# EAGLE board w10_myboard (EAGLE 8.0.1)
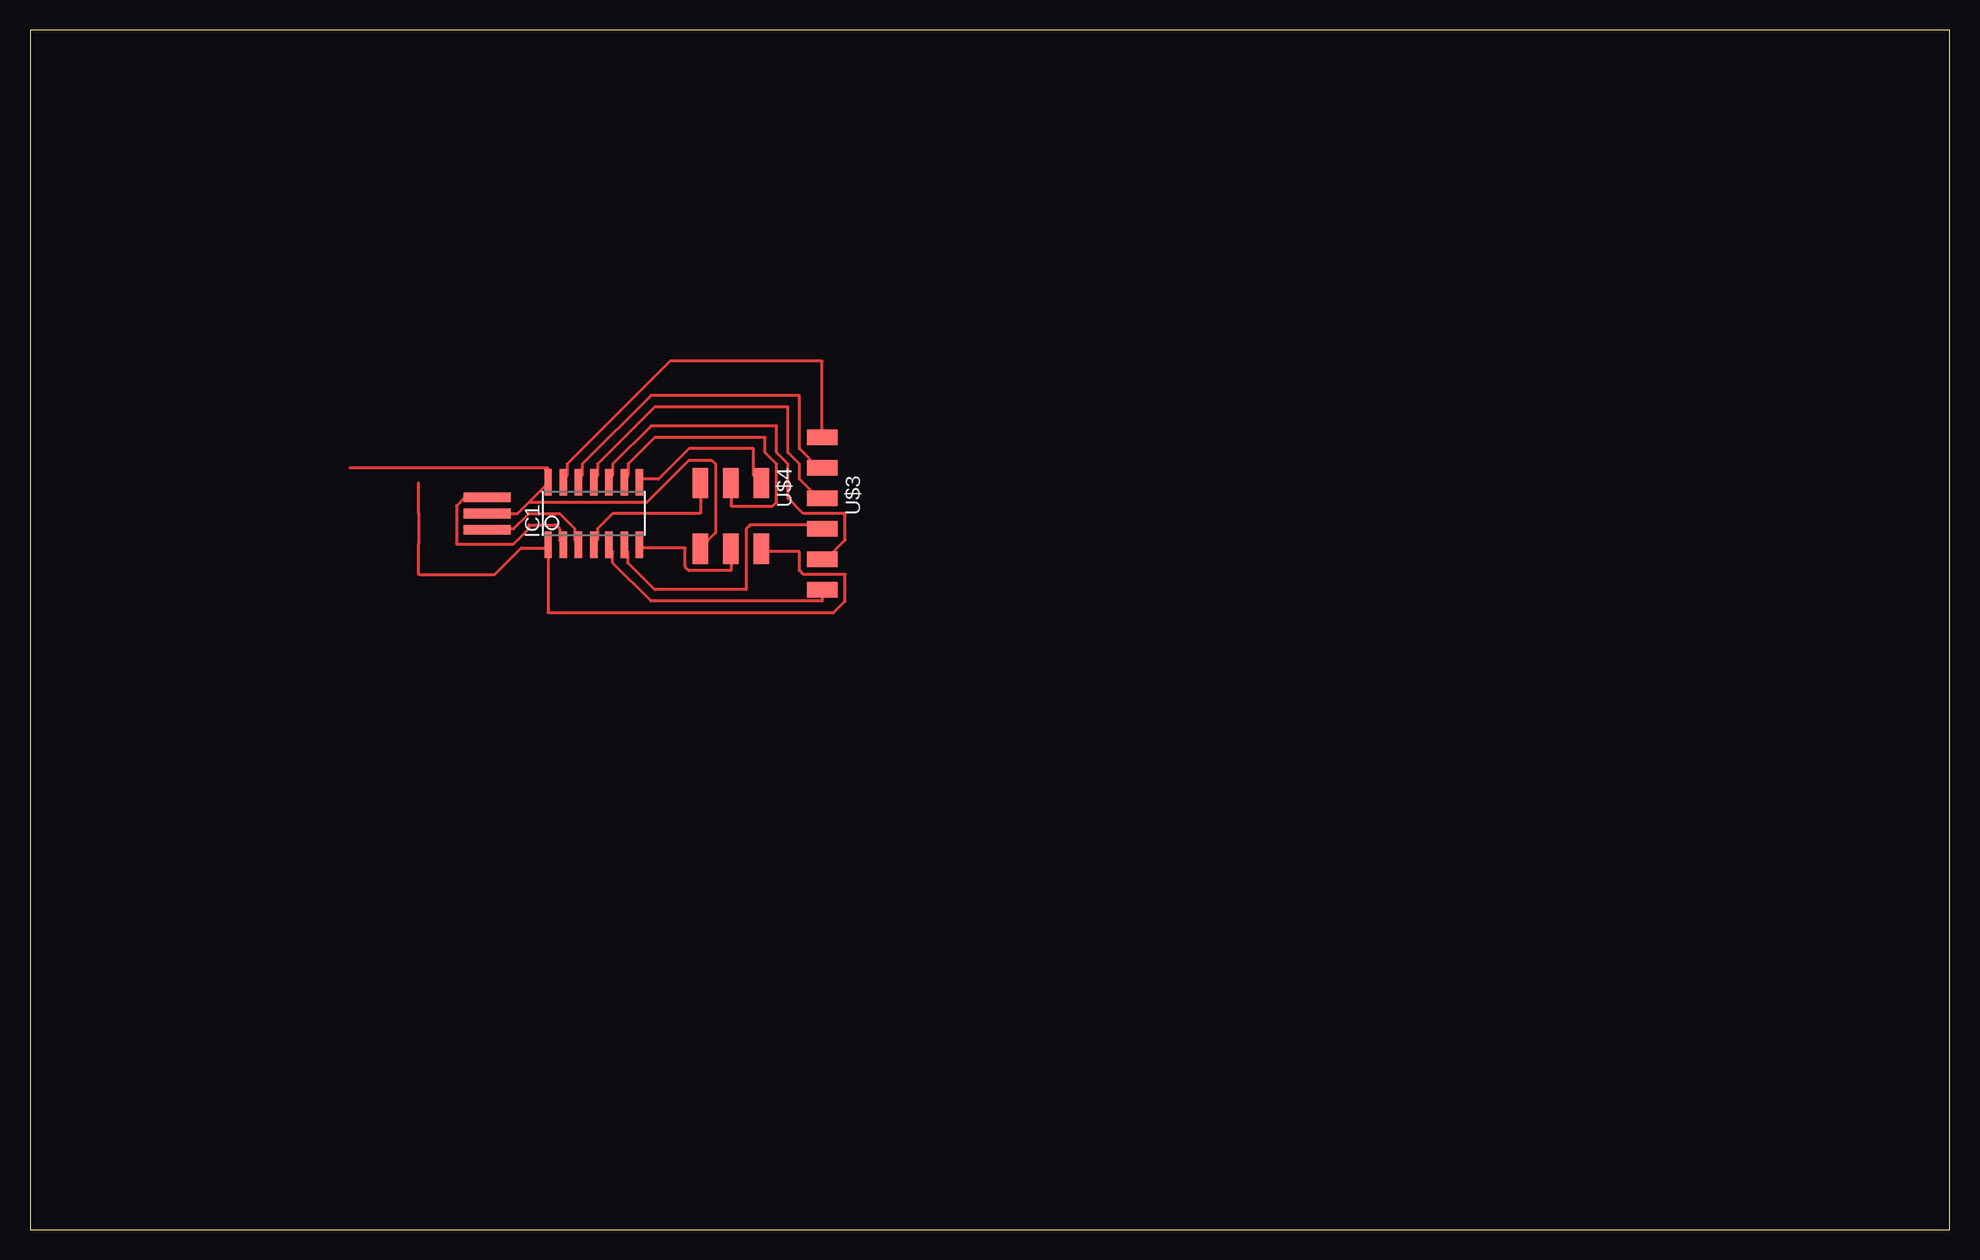
[diagram p0: board, top side]

Size 160 x 100 mm. Coordinates in mm from the lower left corner, seen from the top.
Outline: 0,0 160,0 160,100 0,100 0,0
Copper layers (1*16): Top 0.035mm / dielectric 1.5mm / Bottom 0.035mm
Design rules "default *": minimum track width 10mil, minimum drill 24mil, track to track 16mil, track to pad 16mil, pad to pad 16mil, via to via 8mil, smd to smd 16mil, copper to edge 40mil, drill to drill 8mil, minimum pad ring 10mil, minimum via ring 8mil, stop-mask expansion 4mil, vias tented up to drill 0mil, thermal gap 10mil

## Footprints (pad centres in the part's own frame; a part is rotated, then mirrored left to right if it is on the bottom)
SOIC14 = smd 0.61 x 2.21: 1 -3.81,-2.603; 2 -2.54,-2.603; 3 -1.27,-2.603; 4 0,-2.603; 5 1.27,-2.603; 6 2.54,-2.603; 7 3.81,-2.603; 8 3.81,2.603; 9 2.54,2.603; 10 1.27,2.603; 11 0,2.603; 12 -1.27,2.603; 13 -2.54,2.603; 14 -3.81,2.603
EFOBM = smd 0.8 x 3.9: 1 -1.35,0; 2 0,0; 3 1.35,0
1X06SMD = smd 2.54 x 1.27: 1 0,6.35; 2 0,3.81; 3 0,1.27; 4 0,-1.27; 5 0,-3.81; 6 0,-6.35
2X03SMD = smd 2.54 x 1.27: 1 -2.54,2.54; 2 2.92,2.54; 3 -2.54,0; 4 2.92,0; 5 -2.54,-2.54; 6 2.92,-2.54

## Placement (x,y rotation side)
IC1  ATTINY44-SSU  [SOIC14]  46.99,59.69 0 top
U$1  RESONATOR  [EFOBM]  38.1,59.69 90 top
U$3  FTDI-SMD-HEADER  [1X06SMD]  66.04,59.69 180 top
U$4  AVRISPSMD  [2X03SMD]  58.42,59.69 270 top

## Library data of the parts
IC1 U$1 U$3 U$4 = fab

## Nets
N$1: IC1.2 U$1.3
N$2: IC1.3 U$1.1
N$3: IC1.4 U$4.5
N$4: IC1.7 U$4.4
N$5: IC1.8 U$4.1
N$6: IC1.9 U$4.3
N$7: IC1.5 U$3.1
N$8: IC1.1 U$4.2
N$9: IC1.13 U$3.6
N$10: IC1.12 U$3.5
N$11: IC1.11 U$3.4
N$12: IC1.10 U$3.2
N$13: IC1.6 U$3.3
N$15: IC1.14 U$1.2 U$4.6

## Tracks (layer width: path | path; a pad name or v marks a point on that pad's centre or on a via)
N$1
  Top 0.254: IC1.2 44.45,57.15 44.13,57.47 44.13,58.42 43.81,58.74 41.59,58.74 41.59,58.42 40.32,57.15 35.56,57.15 35.56,60.33 36.2,60.96 38.1,60.96 U$1.3
N$2
  Top 0.254: IC1.3 45.72,57.15 45.4,57.47 45.4,58.42 44.13,59.69 41.59,59.69 40.32,58.42 38.1,58.42 U$1.1
N$3
  Top 0.254: U$4.5 55.88,59.69 48.58,59.69 47.31,58.42 47.31,57.47 46.99,57.15 IC1.4
N$4
  Top 0.254: U$4.4 58.42,54.93 54.93,54.93 54.61,55.24 54.61,56.83 50.8,56.83 IC1.7
N$5
  Top 0.254: U$4.1 60.33,62.87 60.33,65.09 54.93,65.09 52.39,62.55 50.8,62.55 IC1.8
N$6
  Top 0.254: U$4.3 58.42,60.33 61.91,60.33 62.23,60.64 62.23,63.82 61.28,64.77 61.28,66.04 52.07,66.04 49.85,63.82 49.85,62.87 49.53,62.55 IC1.9
N$7
  Top 0.254: U$3.1 66.04,52.39 51.75,52.39 48.58,55.56 48.58,56.52 48.26,56.83 IC1.5
N$8
  Top 0.254: 32.38,62.23 32.38,59.69 32.38,57.15 32.38,54.61 38.73,54.61 40.96,56.83 43.18,56.83 | 43.18,56.83 43.18,51.44 66.99,51.44 67.94,52.39 67.94,54.61 64.45,54.61 64.14,54.93 64.14,56.52 60.96,56.52 U$4.2 | 43.18,56.83 IC1.1
N$9
  Top 0.254: U$3.6 66.04,72.39 53.34,72.39 44.77,63.82 44.77,62.87 44.45,62.55 IC1.13
N$10
  Top 0.254: U$3.5 65.72,63.5 64.14,65.09 64.14,69.53 51.75,69.53 46.04,63.82 46.04,62.87 45.72,62.55 IC1.12
N$11
  Top 0.254: U$3.4 65.72,60.96 64.14,62.55 64.14,63.82 63.18,64.77 63.18,68.58 52.07,68.58 47.31,63.82 47.31,62.87 46.99,62.55 IC1.11
N$12
  Top 0.254: U$3.2 66.36,55.88 67.94,57.47 67.94,59.69 64.45,59.69 63.18,60.96 63.18,63.82 62.23,64.77 62.23,66.99 51.75,66.99 48.58,63.82 48.58,62.87 48.26,62.55 IC1.10
N$13
  Top 0.254: U$3.3 66.04,58.74 60.01,58.74 59.69,58.42 59.69,53.34 52.07,53.34 49.85,55.56 49.85,56.52 49.53,56.83 IC1.6
N$15
  Top 0.254: 41.59,60.64 40.64,59.69 U$1.2 | 41.59,60.64 43.18,62.23 IC1.14 43.18,63.5 26.67,63.5 | 41.59,60.64 51.44,60.64 54.93,64.14 56.83,64.14 57.15,63.82 57.15,58.1 55.88,56.83 U$4.6